# Altium PCB MI_07_08_Rev3_0.PcbDoc
Units mm, origin at the board's own origin, x right, y up, seen from the top; angles counter-clockwise.
Board outline 81 x 59.75 mm, 2 copper layers (Top Layer, Bottom Layer), stack 2.071 mm thick; 46 components, 27 nets, 147 pads, 0 vias.
Unrouted connection lines stored in the file: 6.
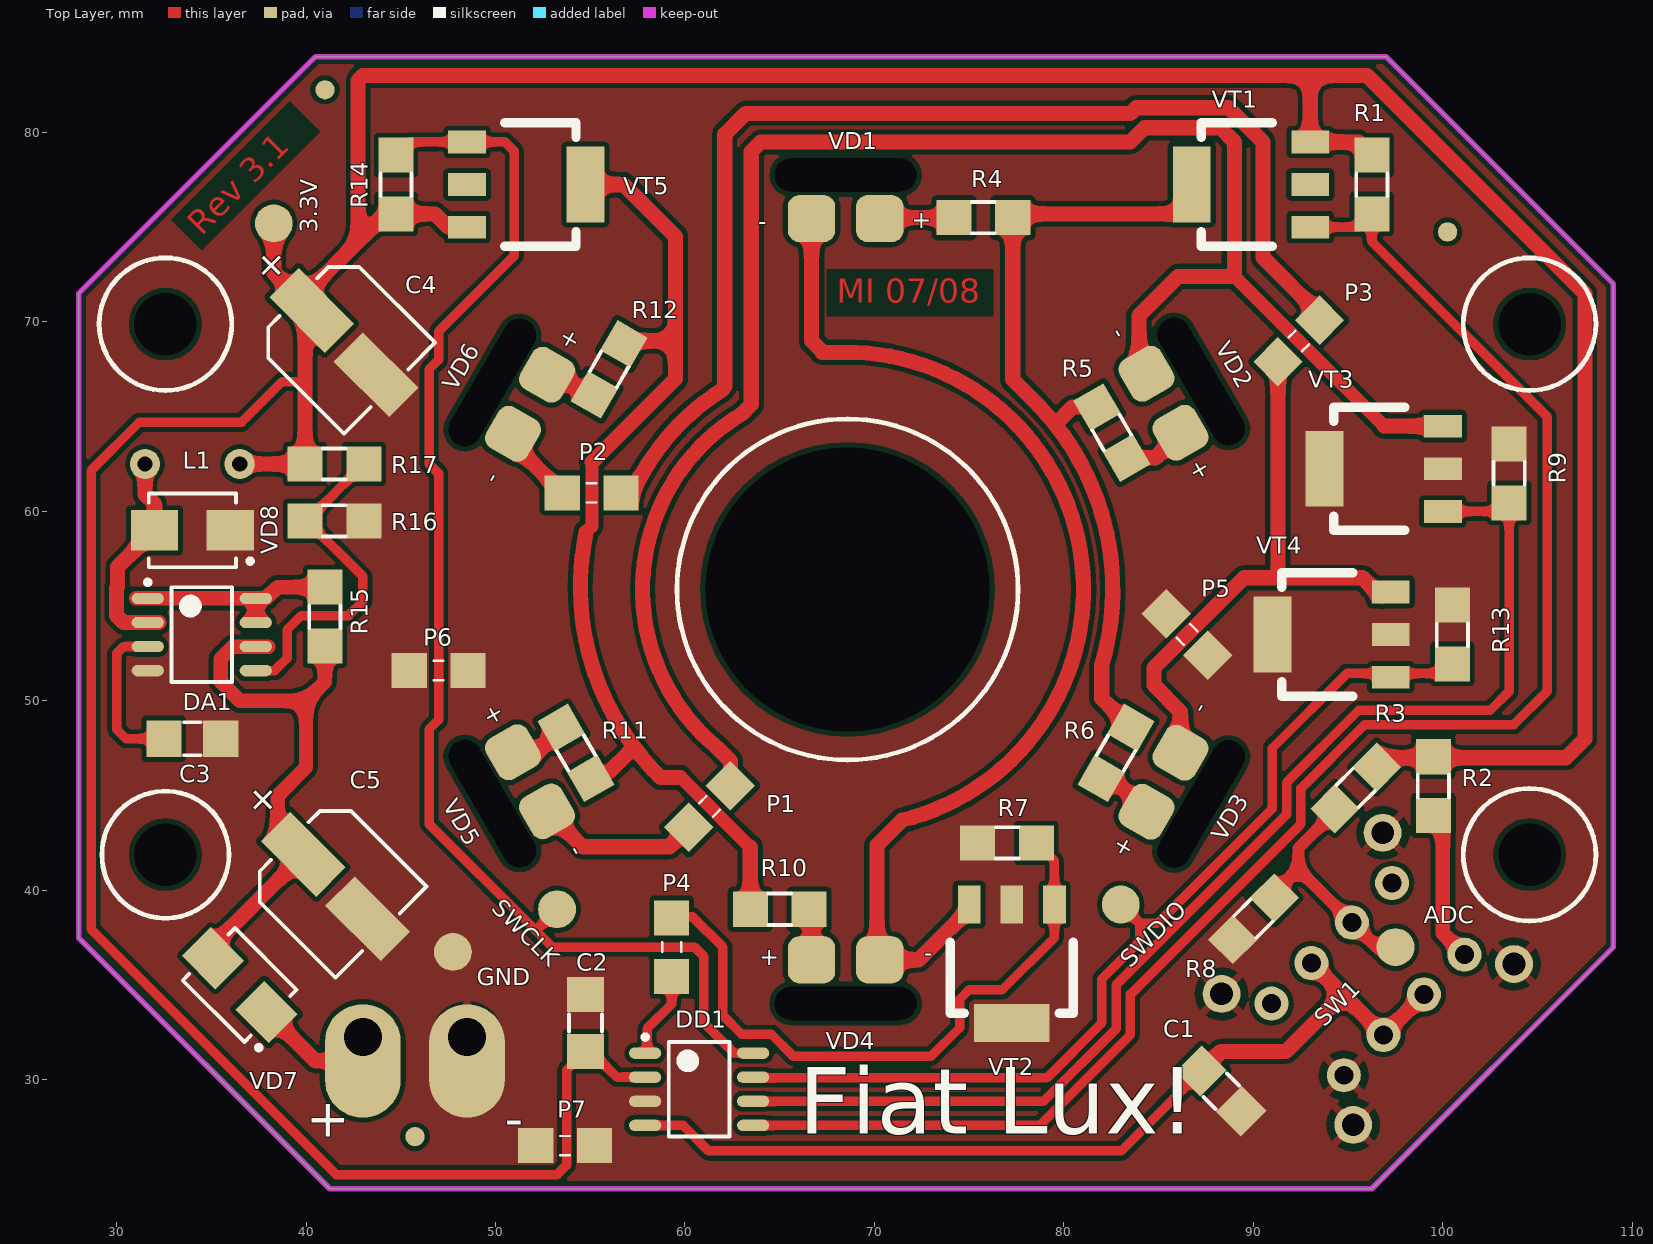
[diagram p0: Top Layer view]
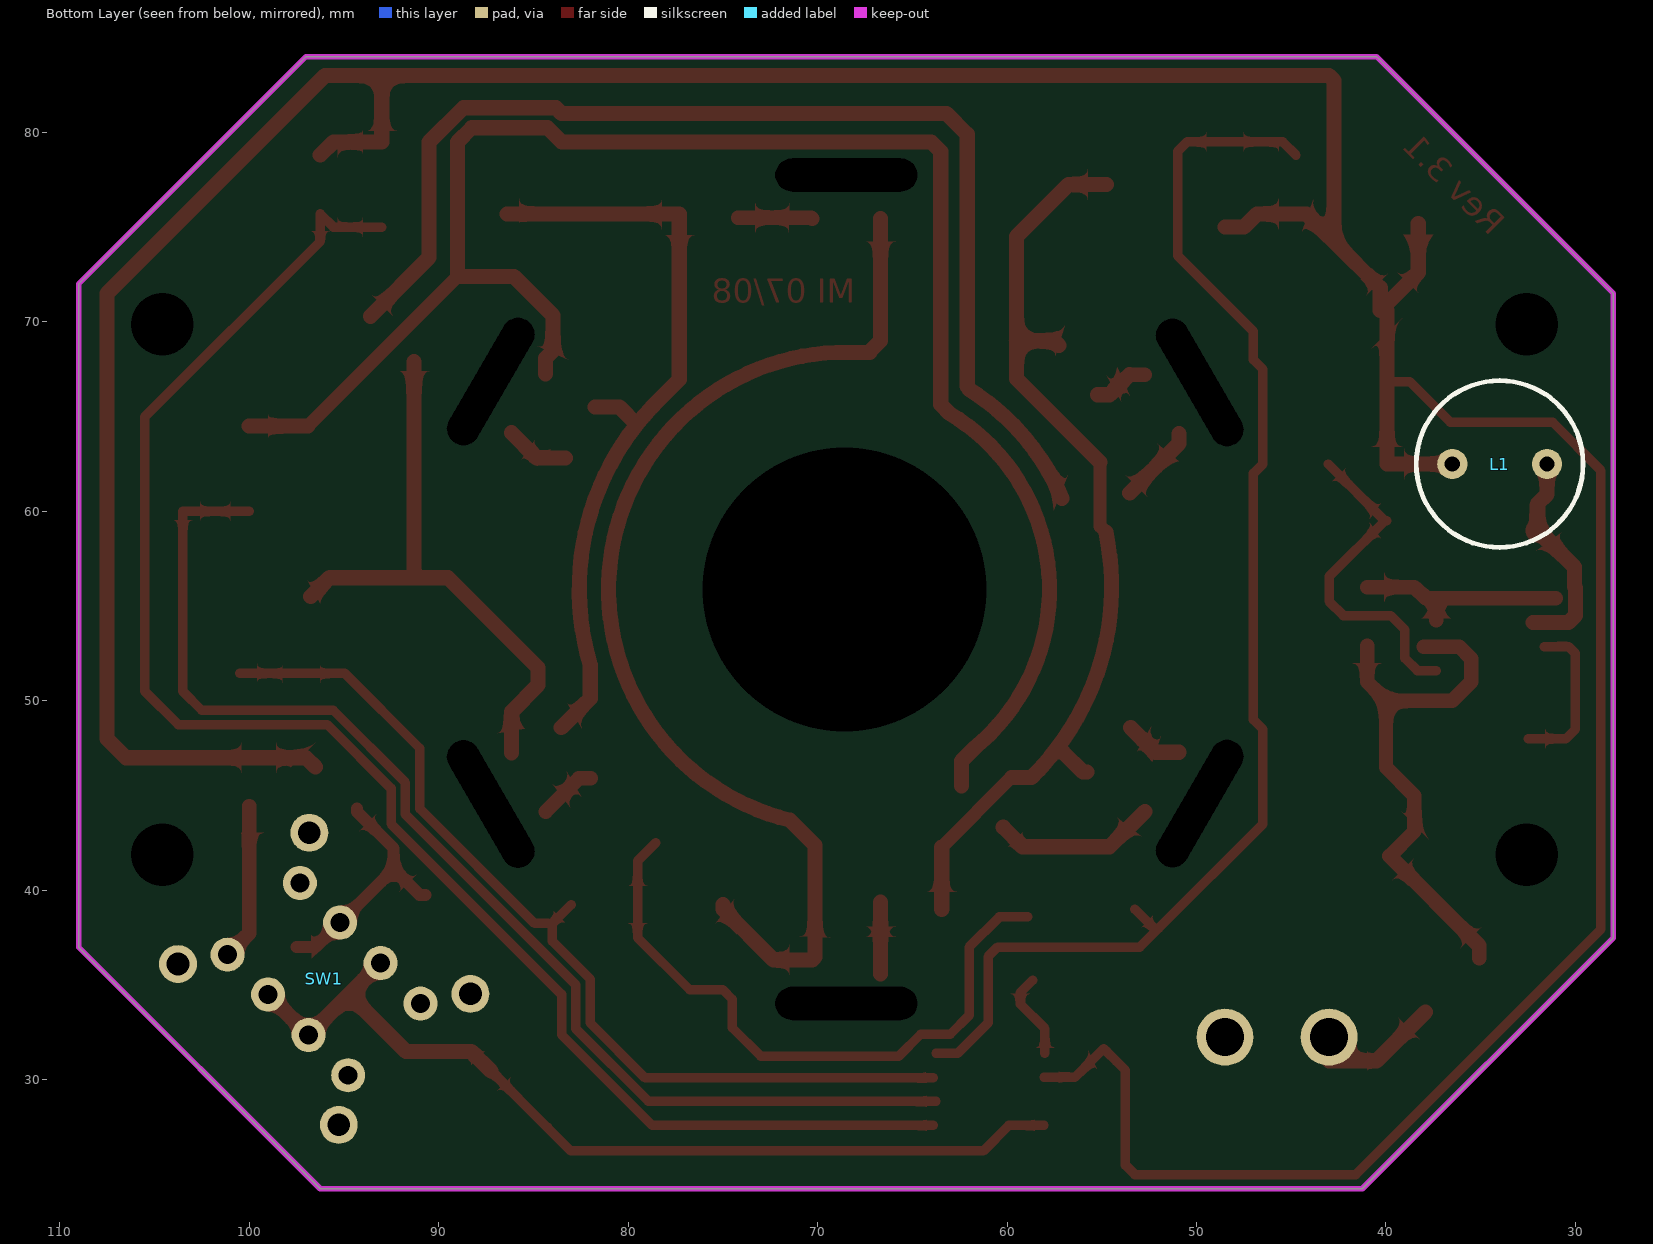
[diagram p1: Bottom Layer view, seen from below]
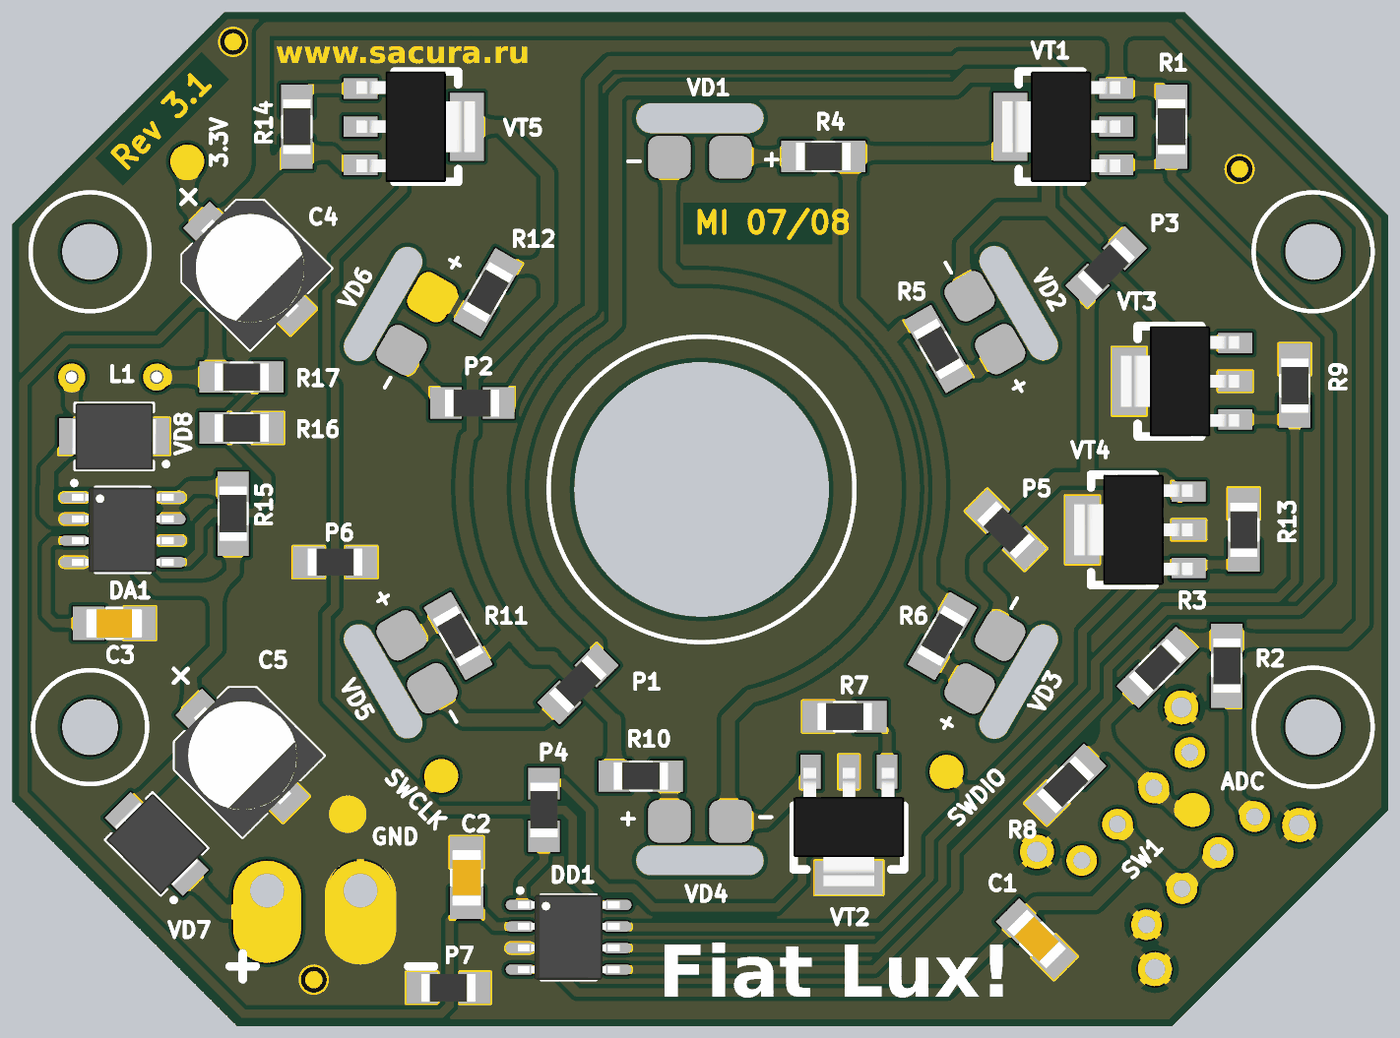
[diagram p2: 3D render of the assembled board from above, using the file's embedded part models]

## Layer stack, top to bottom
Top Solder: solder mask 0.0102, Solder Resist, Dk 3.5
Top Layer: signal copper 0.0356
Dielectric 1: dielectric 2, FR-4, Dk 4.8
Bottom Layer: signal copper 0.0356
Bottom Solder: solder mask 0.0102, Solder Resist, Dk 3.5

## Board outline
96.25,24.25 109,37 109,72 97,84 40.5,84 28,71.5 28,37.5 41.25,24.25

## Design rules (kind name [scope] priority, off if disabled: settings)
Clearance [All] p1: gap=0.254 ignorepadtopadclearanceinfootprint=FALSE except(0: Arc-Hole Track-Hole SMDPad-Hole THPad-Hole Via-Hole Fill-Hole Poly-Hole Region-Hole Text-Hole; 0.127: SMDPad-THPad; 0.2: Arc-SMDPad Track-SMDPad)
ComponentClearance [All] p1: gap=0 collisioncheckmode=3 verticalgap=0.254 showdistances=TRUE
PolygonConnect [All] p1: thpad.connectstyle=Relief thpad.reliefconductorwidth=0.4 thpad.reliefentries=4 thpad.polygonreliefangle="90 Angle" thpad.airgapwidth=0.4 smdpad.connectstyle=Direct smdpad.reliefconductorwidth=0.4 smdpad.reliefentries=4 smdpad.polygonreliefangle="90 Angle" smdpad.airgapwidth=0.254 via.connectstyle=Relief via.reliefconductorwidth=0.4 via.reliefentries=4 via.polygonreliefangle="90 Angle" via.airgapwidth=0.254
RoutingVias [All] p1: holewidth=0.711 width=1.27 viastyle="Through Hole" minholewidth=0.711 minwidth=1.27 maxholewidth=0.711 maxwidth=1.27
SolderMaskExpansion [All] p1: expansion=0.102
Width [All] p1: maxlimit=3 minlimit=0.1 preferedwidth=0.8
29 further rules are at their usual default settings.

## Classes and differential pairs
component class MI_06_07_08_MCU_Rev_3_0: C1 C2 C3 C4 C5 DA1 DD1 R1 R2 R3 R4 R5 R6 R7 R8 R9 R10 R11 R12 R13 R14 R15 R16 R17 SW1 VD1 VD2 VD3 VD4 VD5 VD6 VD7 VD8 VT1 VT2 VT3 VT4 VT5

## Components (designator, comment, footprint, x,y, rotation, side; value= is the part's Value field where it differs from the comment)
C1 "Capacitor" CAP1206 88.3,29.4 r135 top value="0.1 uF"
C2 "Capacitor" CAP1206 54.75,33 r270 top value="0.1 uF"
C3 "Capacitor" CAP1206 34,48 r180 top value="470 pF"
C4 "Capacitor_Polar" CAP6.3x7.7 41.999,68.905 r315 top value=100uF
C5 "Capacitor_Polar" CAP6.3x7.7 41.553,40.197 r315 top value=100uF
DA1 "MC34063" SOIC-8 34.5,53.5 r0 top value=MC34063ACD-TR
DD1 "STM32G030J6" SOIC-8 60.75,29.5 r0 top
L1 "inductor" INDUCTOR0912 34,62.5 r0 bottom value="RLB0914-221KL, 220 uH"
P1 "Comment" RES1206 61.3,44.424 r225 top
P2 "Comment" RES1206 55.075,60.975 r0 top
P3 "Comment" RES1206 92.396,68.996 r45 top
P4 "Comment" RES1206 59.3,37 r270 top
P5 "Comment" RES1206 86.5,53.5 r315 top
P6 "Comment" RES1206 47,51.6 r180 top
P7 "Comment" RES1206 53.675,26.525 r180 top
R1 "Resistor" RES1206 96.25,77.25 r90 top value="10 kOm"
R2 "Resistor" RES1206 99.5,45.5 r270 top value="10 kOm"
R3 "Resistor" RES1206 95.404,45.404 r225 top value="10 kOm"
R4 "Resistor" RES1206 75.75,75.5 r180 top value="5.1 Om"
R5 "Resistor" RES1206 82.525,64.158 r300 top value="5.1 Om"
R6 "Resistor" RES1206 82.75,47.25 r240 top value="5.1 Om"
R7 "Resistor" RES1206 77,42.5 r180 top value="10 kOm"
R8 "Resistor" RES1206 90,38.5 r225 top value="10 kOm"
R9 "Resistor" RES1206 103.5,62 r90 top value="10 kOm"
R10 "Resistor" RES1206 65,39 r180 top value="5.1 Om"
R11 "Resistor" RES1206 54.25,47.25 r300 top value="5.1 Om"
R12 "Resistor" RES1206 56,67.5 r60 top value="5.1 Om"
R13 "Resistor" RES1206 100.5,53.5 r90 top value="10 kOm"
R14 "Resistor" RES1206 44.75,77.25 r270 top value="10 kOm"
R15 "Resistor" RES1206 41,54.45 r270 top value="0.33 Om"
R16 "Resistor" RES1206 41.5,59.5 r0 top value="10 kOm"
R17 "Resistor" RES1206 41.5,62.5 r180 top value="16 kOm"
SW1 "slide switch" "SLIDE SWITCH" 96.03,35.313 r225 bottom
VD1 "LED" LED_MAJAK#1 68.48,77.755 r0 top
VD2 "LED" LED_MAJAK#1 87.249,66.855 r300 top
VD3 "LED" LED_MAJAK#1 87.249,44.555 r240 top
VD4 "LED" LED_MAJAK#1 68.48,34.03 r180 top
VD5 "LED" LED_MAJAK#1 49.83,44.577 r120 top
VD6 "LED" LED_MAJAK#2 49.83,66.802 r60 top
VD7 "Diode" SMB 36.5,35 r135 top value=SS210
VD8 "Diode" SMB 34,59 r180 top value=SS210
VT1 "MOSFET-P" SOT223 89.75,77.25 r90 top value=IRFL9014TRPBF
VT2 "MOSFET-N" SOT223 77.25,36 r180 top value=IRLL024NPBF
VT3 "MOSFET-N" SOT223 96.75,62.25 r90 top value=IRLL024NPBF
VT4 "MOSFET-N" SOT223 94,53.5 r90 top value=IRLL024NPBF
VT5 "MOSFET-P" SOT223 51.75,77.25 r270 top value=IRFL9014TRPBF

## Footprints (in the part's own frame and the unit in brackets; to place one, negate y for a bottom-side part, rotate by r counter-clockwise, add the part's x,y. Pads: shape width x height; smd on the part's side, far side on the other; paste and mask are expansions set on the pad)
CAP6.3x7.7 [mm]
  rect 4.15x2.2 smd: 1(-2.4,0) 2(2.4,0)
  silkscreen extent -3.4,-3.4 3.4,3.4, body extent -3.6,-3.4 3.6,3.4, height 7.7
CAP1206 [mm]
  rect 1.85x1.95 smd: 1(-1.5,0) 2(1.5,0)
  silkscreen extent -0.45,-0.88 0.45,0.88, body extent -1.65,-0.85 1.65,0.85, height 1.5
INDUCTOR0912 [mm]
  round 1.6 hole 0.8: 1(-2.5,0) 2(2.5,0)
  silkscreen extent -4.4,-4.4 4.4,4.4, body extent -4.35,-4.35 4.35,4.35, height 11
LED_MAJAK#1 [mm]
  round 0 hole 1.75 slot 7.5 at 0 deg: 0(0,0)
  rrect50% 2.5x2.5 smd: 1(-1.8,-2.3) 2(1.8,-2.3)
LED_MAJAK#2 [mm]
  round 0 hole 1.75 slot 7.5 at 0 deg: 0(0,0)
  rrect50% 2.5x2.5 smd: 1(-1.8,-2.3)
  rrect50% 2.5x2.5 smd paste-3: 2(1.8,-2.3)
RES1206 [mm] "Chip Resistor, 2-Leads, Body 3,20x1,60mm, IPC Medium Density"
  rect 1.85x1.85 smd: 1(-1.55,0) 2(1.55,0)
  silkscreen extent -0.25,-0.51 0.25,0.51, body extent -1.6,-0.8 1.6,0.8, height 0.6
"SLIDE SWITCH" [mm]
  round 2 hole 1.2: 0(-6.025,4.9) 0(-6.025,-4.9) 0(5.975,-4.9) 0(6,4.9)
  round 1.8 hole 1: 1(-4.525,-2.7) 2(-1.525,-2.675) 3(1.5,-2.675) 4(4.475,-2.7) 5(4.5,2.675) 6(1.5,2.7) 7(-1.525,2.7) 8(-4.5,2.675)
  body extent -6.9,-5 6.9,5, height 16
SMB [mm] "Molded Diode, 2-Leads, Body 4,29x3,60mm, IPC Medium Density"
  rect 2.5x2.15 smd: 1(-2,0) 2(2,0)
  silkscreen extent -3.17,-1.95 2.3,1.95, body extent -2.5,-1.95 2.5,1.95, height 2.2
SOIC-8 [mm] "SOIC, 8-Leads, Body 4,90x3,90mm, Pitch 1,27mm, IPC Medium Density"
  oval 1.7x0.6 smd: 1(-2.85,1.905) 2(-2.85,0.635) 3(-2.85,-0.635) 4(-2.85,-1.905) 5(2.85,-1.905) 6(2.85,-0.635) 7(2.85,0.635) 8(2.85,1.905)
  silkscreen extent -2.97,-2.5 1.6,2.88, body extent -3,-2.5 3,2.5, height 1.75
SOT223 [mm]
  rect 1.2x2 smd: 1(-2.25,-3.25) 2(0,-3.25) 3(2.25,-3.25)
  rect 4x2 smd: 2(0,3)
  silkscreen extent -3.25,-1.25 3.25,2.5, body extent -3.25,-3.48 3.25,3.48, height 1.7

## Free pads (board coordinates)
  round 0 / inner round 3.3 / far side round 0 hole 3.3 unplated mask-25.4: 0(32.58,41.88) 0(32.58,69.88) 0(104.58,41.88) 0(104.58,69.88)
  round 0 hole 15 unplated: 0(68.58,55.88)
  round 1.016 smd paste-5 mask+0.381: 10(41,82.25) 10(45.75,27) 10(100.25,74.75)
  oval 4x6 smd paste-5: 11(43,31) 11(48.5,31)
  round 2 smd paste-3: 12(38.3,75.2) 12(47.75,36.75) 12(53.25,39) 12(83,39.25) 12(97.5,37)
  round 3 hole 2: 13(43,32.25) 13(48.5,32.25)

## Nets (pads, with @x,y where several pads share a name; then routed paths per layer and width w, separated by ;. In a path a pad name is that pad's centre, name@x,y a point inside that pad or via, vN(x,y) a via of type N, cw(c..) or ccw(c..) an arc to the next point about the centre after c; other vN are vias at no path point)
3.3V: C2.2 C4.1 DD1.2 L1.2 pad.12@38.3,75.2 R1.2 R2.1 R3.1 R14.2 R17.2 VT1.3 VT5.3 | length 227.1
  Top Layer w0.5: 39.95,67 39.8,66.85 38.75,66.85 36.6,64.7 31.2,64.7 28.654,62.154 28.654,37.946 41.6,25 53.25,25 53.75,25.5 53.75,30.5 54.225,30.975 C2.2 54.9,31.65 56.415,30.135 DD1.2 DD1.2@58.05,30.135
  Top Layer w0.8: L1.2 R17.2 39.95,67 C4.1@39.95,70.602 ; pad.12@38.3,75.2 38.3,72.604 C4.1 40.302,71.802 42.75,74.25 ; VT5.3 47.5,75 46.8,75.7 R14.2 44.2,75.7 42.75,74.25 ; R1.2 95.55,79.5 VT1.3 93,83 ; R3.1 97,47 106.5,47 107.5,48 107.5,71.5 96,83 93,83 ; 42.75,74.25 42.75,82.75 43,83 93,83
12V: pad.11@43,31 pad.13@43,32.25 VD7.1 | length 6.2
  Top Layer w0.8: VD7.1 40.5,31 pad.13@43,31
GND: C1.1 C2.1 C3.1 C4.2 C5.2 DA1.4 DD1.3 P5.1 P5.2 P6.1 P6.2 P7.1 P7.2 pad.11@48.5,31 pad.12@47.75,36.75 pad.13@48.5,32.25 R7.2 R8.2 R9.2 R13.2 R16.2 SW1.0 SW1.4 VD8.1 VT2.2 VT3.2 VT4.2
NetC1_2: C1.2 DD1.4 SW1.2 SW1.3 SW1.6 | length 49.1
  Top Layer w0.5: DD1.4@58.05,27.6 59.9,27.6 61.25,26.25 83.029,26.25 84.25,27.471 ; 84.25,27.5 84.25,27.471 ; C1.2 84.25,27.471
  Top Layer w0.8: C1.2 88.279,31.5 91.722,31.5 94.722,34.5 ; SW1.6 94.722,34.5 ; SW1.2 SW1.3 94.722,34.5
NetC3_2: C3.2 DA1.3 | length 8.5
  Top Layer w0.5: DA1.3 30.365,52.865 30,52.5 30,48.5 30.5,48 C3.2
NetC5_1: C5.1 DA1.6 R15.2 VD7.2 | length 28.9
  Top Layer w0.762: VD7.2 VD7.2@35.086,37.086 ; DA1.6@38,52.865 DA1.6 36.135,52.865 35.5,52.23 35.5,51 36.5,50 40,50 ; C5.1@39.803,41.803 38.5,43.106 38.5,45 40,46.5 40,50 ; R15.2 41,51 40,50
  Top Layer w0.8: VD7.2@35.086,37.086 C5.1@39.803,41.803
NetDA1_1: DA1.1 DA1.7 DA1.8 R15.1 | length 11.4
  Top Layer w0.762: DA1.1@31.035,55.405 DA1.1 DA1.8 ; DA1.7@37.35,54.25 DA1.8 ; R15.1 38.5,56 37.905,55.405 DA1.8
NetDA1_2: DA1.2 L1.1 VD8.2 | length 11.4
  Top Layer w0.8: L1.1 31.5,60.9 32,60.4 VD8.2 30.058,57.058 30.058,56.026 30,55.968 30,54.5 30.365,54.135 DA1.2 DA1.2@32.25,54.135
NetDA1_5: DA1.5 R16.1 R17.1 | length 17.9
  Top Layer w0.5: DA1.5 38.345,51.595 39,52.25 39,53.75 39.75,54.5 42.25,54.5 43,55.25 43,56.563 40.063,59.5 R16.1@40.05,59.5 ; R16.1 R16.1@40.05,59.5 ; R17.1 R16.1@40.05,59.5
NetDD1_1: DD1.1 P4.1 P4.2 R7.1 VT2.1 | length 39.3
  Top Layer w0.5: DD1.1@58,31.405 58,32.7 59.3,34 59.3,34.6 P4.2@58.65,35.25 ; P4.1@58.9,38.6 60.4,38.6 62,37 62,33.4 63,32.4 64.558,32.4 65.708,31.25 73,31.25 74.5,32.75 74.5,34.25 75,34.75 76.75,34.75 79.5,37.5 VT2.1 79.5,41.55 R7.1
NetDD1_5: DD1.5 R1.1 VT1.1 | length 86
  Top Layer w0.5: DD1.5@63.9,27.6 78.733,27.6 83.508,32.375 83.508,34.508 92.508,43.508 92.508,45.375 95.879,48.746 103.746,48.746 105.5,50.5 105.5,65 96.25,74.25 R1.1 95.55,75 VT1.1
NetDD1_6: DD1.6 R9.1 VT3.1 | length 64.1
  Top Layer w0.5: DD1.6@63.75,28.865 78.931,28.865 82.754,32.688 82.754,35.004 91.754,44.004 91.754,45.688 95.566,49.5 102.5,49.5 103.5,50.5 103.5,60 VT3.1
NetDD1_7: DD1.7 pad.12@83,39.25 R13.1 VT4.1 | length 50.4
  Top Layer w0.5: DD1.7@63.9,30.1 79.1,30.1 82,33 82,35.316 84,37.316 84,38.25 pad.12@83,39.25 ; 84.225,38.25 84.934,38.25 91,44.316 91,47.5 94.95,51.45 R13.1@100.5,51.45
NetDD1_8: DD1.8 pad.12@53.25,39 R14.1 VT5.1 | length 70.5
  Top Layer w0.5: R14.1 45.45,79.5 VT5.1 50.5,79.5 51,79 51,73.5 47,69.5 47,68 46.5,67.5 46.5,62.5 47,62 47,49 46.5,48.5 46.5,43.5 52,38 ; pad.12@53.25,39 52.25,38 52,38 ; DD1.8@63.75,31.405 DD1.8 62.595,31.405 61,33 61,36.5 60.5,37 53,37 52,38
NetR2_2: R2.2 SW1.1 | length 8.4
  Top Layer w0.762: R2.2@100,44.45 100,37.743 SW1.1 SW1.1@101.096,36.561
NetR3_2: pad.12@97.5,37 R3.2 R8.1 SW1.7 | length 13.1
  Top Layer w0.635: R8.1@90.692,39.75 91,39.75 92.375,41.125 ; R3.2 94.308,44.146 92.375,42.213 92.375,41.125 ; pad.12@97.5,37 96.5,37 SW1.7 92.375,41.125
NetR4_1: R4.1 R5.1 R6.1 VT1.2 | length 40.9
  Top Layer w0.8: R4.1 77.3,66.958 78.393,65.865 cw(c68.58,55.88) 79.544,64.586 ; R4.1@77.3,75.7 VT1.2@86.4,75.7 ; R5.1 80.458,65.5 79.544,64.586 ; R6.1 82.002,50.116 82.002,51.898 ccw(c68.58,55.88) 79.544,64.586
NetR4_2: R4.2 VD1.2 | length 3.9
  Top Layer w0.762: VD1.2 70.325,75.5 R4.2
NetR5_2: R5.2 VD2.2 | length 3.4
  Top Layer w0.8: R5.2 84.826,62.815 VD2.2
NetR6_2: R6.2 VD3.2 | length 3.1
  Top Layer w0.762: R6.2 82.596,45.908 VD3.2
NetR10_1: R10.1 VD4.2 | length 3.8
  Top Layer w0.8: VD4.2@66.68,35.58 VD4.2 R10.1@66.68,39.37
NetR10_2: R10.2 R11.2 R12.2 VT5.2 | length 51.4
  Top Layer w0.7: 54.786,58.903 55.09,59.206 55.09,62.59 ; 59.768,45.956 63.45,42.274
  Top Layer w0.8: VT5.2@54.75,77.25 56.75,77.25 59.5,74.5 59.5,69 ; 54.786,58.903 ccw(c68.484,56.007) 57.384,47.475 ccw(c68.58,55.88) 58.705,45.956 59.768,45.956 ; 55.09,62.59 59.5,67 59.5,69 ; R11.2@55.775,46.25 56,46.25 57.064,47.314 57.336,47.314 ; R12.2@57.25,68.75 57.5,69 59.5,69 ; R10.2 63.45,42.274
NetR11_1: R11.1 VD5.2 | length 3.1
  Top Layer w0.8: VD5.2 52.169,47.286 R11.1
NetR12_1: R12.1 VD6.2 | length 2.9
  Top Layer w0.762: VD6.2 VD6.2@53.539,67.211
  Top Layer w0.8: VD6.2@53.539,67.211 54.592,66.158 R12.1
NetVD1_1: VD1.1 VD4.1 VT2.3 | length 59
  Top Layer w0.8: VD1.1 66.68,69.002 67.25,68.432 67.25,68.394 69.006,68.394 cw(c68.501,55.874) 71.452,43.698 70.133,42.379 70.133,36.477 VD4.1 72.33,36.33 75,39 VT2.3
NetVD2_1: P1.1 P1.2 VD2.1 VD5.1 VT3.3 | length 102.5
  Top Layer w0.7: 89,72.4 96.9,64.5
  Top Layer w0.8: VD5.1 54.59,42.3 59.176,42.3 P1.2 ; P1.1 62.396,46.831 61.668,47.559 cw(c68.58,55.88) 63.037,65.17 63.5,65.632 63.5,79 64,79.5 83.5,79.5 84.25,80.25 88.25,80.25 89,79.5 89,72.4 86.031,72.4 83.962,70.331 83.962,68.479 84.357,68.084 VD2.1 ; 96.9,64.5 VT3.3
NetVD3_1: P2.1 P2.2 P3.1 P3.2 VD3.1 VD6.1 VT4.3 | length 96.4
  Top Layer w0.8: VD6.1 50.922,63.578 P2.1 ; P2.2@57.103,60.674 cw(c68.58,55.88) 62.002,66.436 ; 62.1,66.6 62.1,79.9 63.2,81 83.509,81 83.813,81.304 88.696,81.304 90.5,79.5 90.5,73.4 P3.2@93.6,70.3 ; VD3.1 86.157,49.421 84.75,50.828 84.75,51.75 89.5,56.5 91,56.5 ; P3.1 91.3,56.8 91,56.5 ; VT4.3@96.75,55.5 95.75,56.5 91,56.5
pads on no net: SW1.5 SW1.8 VD1.0 VD2.0 VD3.0 VD4.0 VD5.0 VD6.0

## Polygon pours and split planes (outlines as drawn)
GND on Top Layer "Bottom Layer-No Net 1" (solid, pour order 2): 41.261,24.25 28.007,37.504 28.007,71.504 40.507,84.004 97.007,84.004 109.007,72.004 109.007,37.004 96.253,24.25

## Keep-outs
Keep-Out Layer:
  the board outline again, w0.3

## Other copper
Top Layer:
  text "Rev 3.1" at 34.5,74.5 h1.27 r45
  text "MI 07/08" at 68,71 h1.27

## Silkscreen, mask and mechanical layers (free items; w line width, h text height)
Top Overlay:
  circle w0.254: c32.58,69.88 r3.5
  circle w0.254: c32.58,41.88 r3.354
  circle w0.254: c104.58,69.88 r3.5
  circle w0.254: c104.58,41.88 r3.5
  circle w0.254: c68.58,55.88 r9
  text "3.3V" at 40.6,74.7 h0.9 r90
  text "SWCLK" at 49.75,39 h0.9 r315
  text "ADC" at 99,38.25 h0.9
  text "SWDIO" at 83.5,35.854 h0.9 r45
  text "GND" at 49,35 h0.9
  text "+" at 40,27 h2
  text "-" at 50.5,27 h2
  text "Fiat Lux!" at 66,26 h6
Top Paste:
Top Solder:
  region: 104.58,43.638 104.237,43.605 103.907,43.505 103.603,43.342 103.337,43.123 103.118,42.857 102.955,42.553 102.855,42.223 102.822,41.88 102.855,41.537 102.955,41.207 103.118,40.903 103.337,40.637 103.603,40.418 103.907,40.255 104.237,40.155 104.58,40.122 104.923,40.155 105.253,40.255 105.557,40.418 105.823,40.637 106.042,40.903 106.205,41.207 106.305,41.537 106.338,41.88 106.305,42.223 106.205,42.553 106.042,42.857 105.823,43.123 105.557,43.342 105.253,43.505 104.923,43.605 104.58,43.638
  region: 104.58,71.638 104.237,71.605 103.907,71.505 103.603,71.342 103.337,71.123 103.118,70.857 102.955,70.553 102.855,70.223 102.822,69.88 102.855,69.537 102.955,69.207 103.118,68.903 103.337,68.637 103.603,68.418 103.907,68.255 104.237,68.155 104.58,68.122 104.923,68.155 105.253,68.255 105.557,68.418 105.823,68.637 106.042,68.903 106.205,69.207 106.305,69.537 106.338,69.88 106.305,70.223 106.205,70.553 106.042,70.857 105.823,71.123 105.557,71.342 105.253,71.505 104.923,71.605 104.58,71.638
  region: 32.58,43.638 32.237,43.605 31.907,43.505 31.603,43.342 31.337,43.123 31.118,42.857 30.955,42.553 30.855,42.223 30.822,41.88 30.855,41.537 30.955,41.207 31.118,40.903 31.337,40.637 31.603,40.418 31.907,40.255 32.237,40.155 32.58,40.122 32.923,40.155 33.253,40.255 33.557,40.418 33.823,40.637 34.042,40.903 34.205,41.207 34.305,41.537 34.338,41.88 34.305,42.223 34.205,42.553 34.042,42.857 33.823,43.123 33.557,43.342 33.253,43.505 32.923,43.605 32.58,43.638
  region: 32.58,71.638 32.237,71.605 31.907,71.505 31.603,71.342 31.337,71.123 31.118,70.857 30.955,70.553 30.855,70.223 30.822,69.88 30.855,69.537 30.955,69.207 31.118,68.903 31.337,68.637 31.603,68.418 31.907,68.255 32.237,68.155 32.58,68.122 32.923,68.155 33.253,68.255 33.557,68.418 33.823,68.637 34.042,68.903 34.205,69.207 34.305,69.537 34.338,69.88 34.305,70.223 34.205,70.553 34.042,70.857 33.823,71.123 33.557,71.342 33.253,71.505 32.923,71.605 32.58,71.638
  text "www.sacura.ru" at 43.5,81 h2.54
  text "Rev 3.1" at 34.5,74.5 h1.27 r45
  text "MI 07/08" at 68,71 h1.27
Bottom Solder:
  region: 104.58,43.638 104.237,43.605 103.907,43.505 103.603,43.342 103.337,43.123 103.118,42.857 102.955,42.553 102.855,42.223 102.822,41.88 102.855,41.537 102.955,41.207 103.118,40.903 103.337,40.637 103.603,40.418 103.907,40.255 104.237,40.155 104.58,40.122 104.923,40.155 105.253,40.255 105.557,40.418 105.823,40.637 106.042,40.903 106.205,41.207 106.305,41.537 106.338,41.88 106.305,42.223 106.205,42.553 106.042,42.857 105.823,43.123 105.557,43.342 105.253,43.505 104.923,43.605 104.58,43.638
  region: 104.58,71.638 104.237,71.605 103.907,71.505 103.603,71.342 103.337,71.123 103.118,70.857 102.955,70.553 102.855,70.223 102.822,69.88 102.855,69.537 102.955,69.207 103.118,68.903 103.337,68.637 103.603,68.418 103.907,68.255 104.237,68.155 104.58,68.122 104.923,68.155 105.253,68.255 105.557,68.418 105.823,68.637 106.042,68.903 106.205,69.207 106.305,69.537 106.338,69.88 106.305,70.223 106.205,70.553 106.042,70.857 105.823,71.123 105.557,71.342 105.253,71.505 104.923,71.605 104.58,71.638
  region: 32.58,43.638 32.237,43.605 31.907,43.505 31.603,43.342 31.337,43.123 31.118,42.857 30.955,42.553 30.855,42.223 30.822,41.88 30.855,41.537 30.955,41.207 31.118,40.903 31.337,40.637 31.603,40.418 31.907,40.255 32.237,40.155 32.58,40.122 32.923,40.155 33.253,40.255 33.557,40.418 33.823,40.637 34.042,40.903 34.205,41.207 34.305,41.537 34.338,41.88 34.305,42.223 34.205,42.553 34.042,42.857 33.823,43.123 33.557,43.342 33.253,43.505 32.923,43.605 32.58,43.638
  region: 32.58,71.638 32.237,71.605 31.907,71.505 31.603,71.342 31.337,71.123 31.118,70.857 30.955,70.553 30.855,70.223 30.822,69.88 30.855,69.537 30.955,69.207 31.118,68.903 31.337,68.637 31.603,68.418 31.907,68.255 32.237,68.155 32.58,68.122 32.923,68.155 33.253,68.255 33.557,68.418 33.823,68.637 34.042,68.903 34.205,69.207 34.305,69.537 34.338,69.88 34.305,70.223 34.205,70.553 34.042,70.857 33.823,71.123 33.557,71.342 33.253,71.505 32.923,71.605 32.58,71.638
Mechanical 4:
  the board outline again, w0.05

## Text inside footprints (layer, text, board x,y; h text height)
C4: Top Overlay "+" at 37.999,71.905 h1.52 r45
C5: Top Overlay "+" at 37.553,43.697 h1.52 r45
VD1: Top Overlay "+" at 71.98,74.955 h0.9; Top Overlay "-" at 63.88,74.855 h0.9
VD2: Top Overlay "+" at 86.574,62.424 h0.9 r300; Top Overlay "-" at 82.438,69.389 h0.9 r300
VD3: Top Overlay "+" at 83.074,42.924 h0.9 r240; Top Overlay "-" at 87.038,49.989 h0.9 r240
VD4: Top Overlay "+" at 64.98,36.83 h0.9 r180; Top Overlay "-" at 73.08,36.93 h0.9 r180
VD5: Top Overlay "+" at 50.505,49.008 h0.9 r120; Top Overlay "-" at 54.641,42.043 h0.9 r120
VD6: Top Overlay "+" at 54.005,68.433 h0.9 r60; Top Overlay "-" at 50.041,61.368 h0.9 r60